# Altium PCB PCB1.PcbDoc
Units mil, origin at the board's own origin, x right, y up, seen from the top; angles counter-clockwise.
Board outline 3550 x 4871 mil, 2 copper layers (Top Layer, Bottom Layer); 4 components, 26 nets, 32 pads, 0 vias.
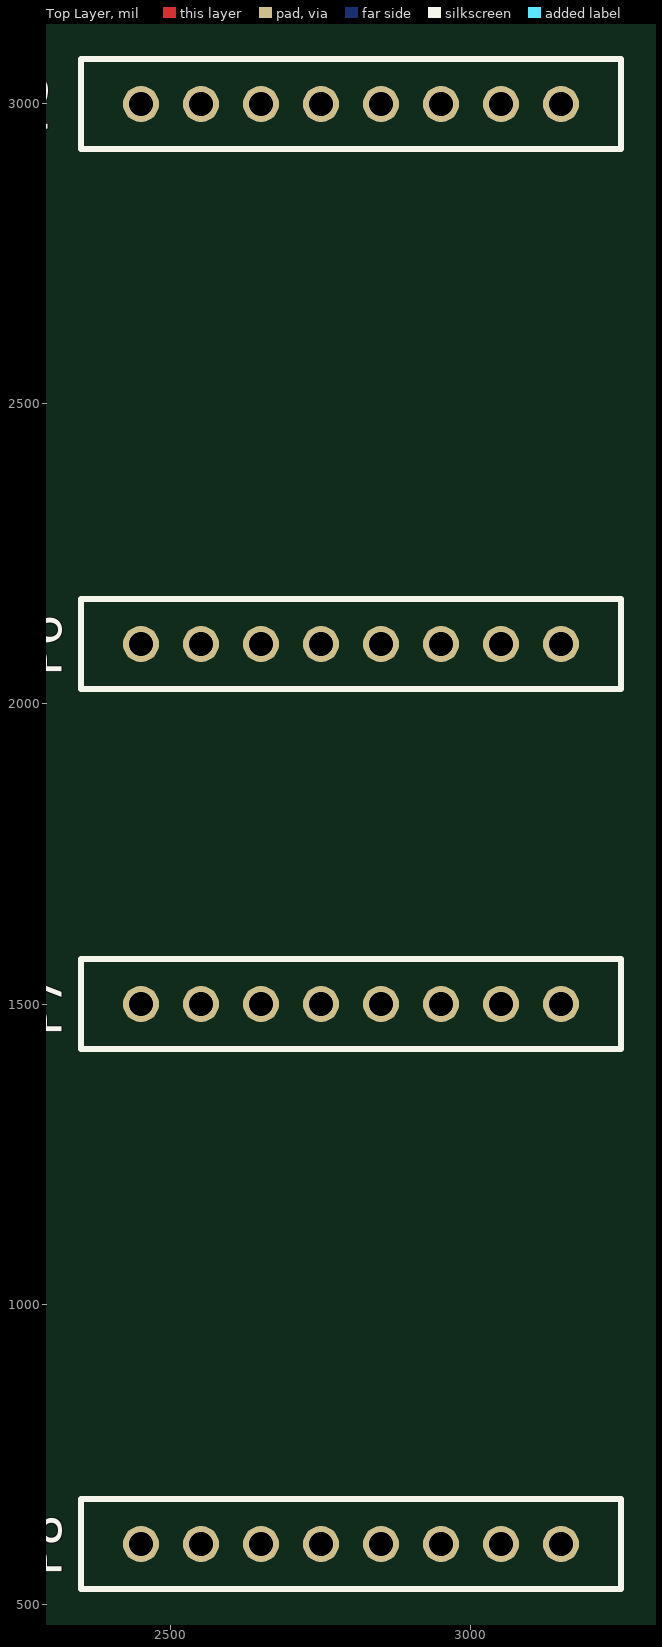
[diagram p0: Top Layer view]
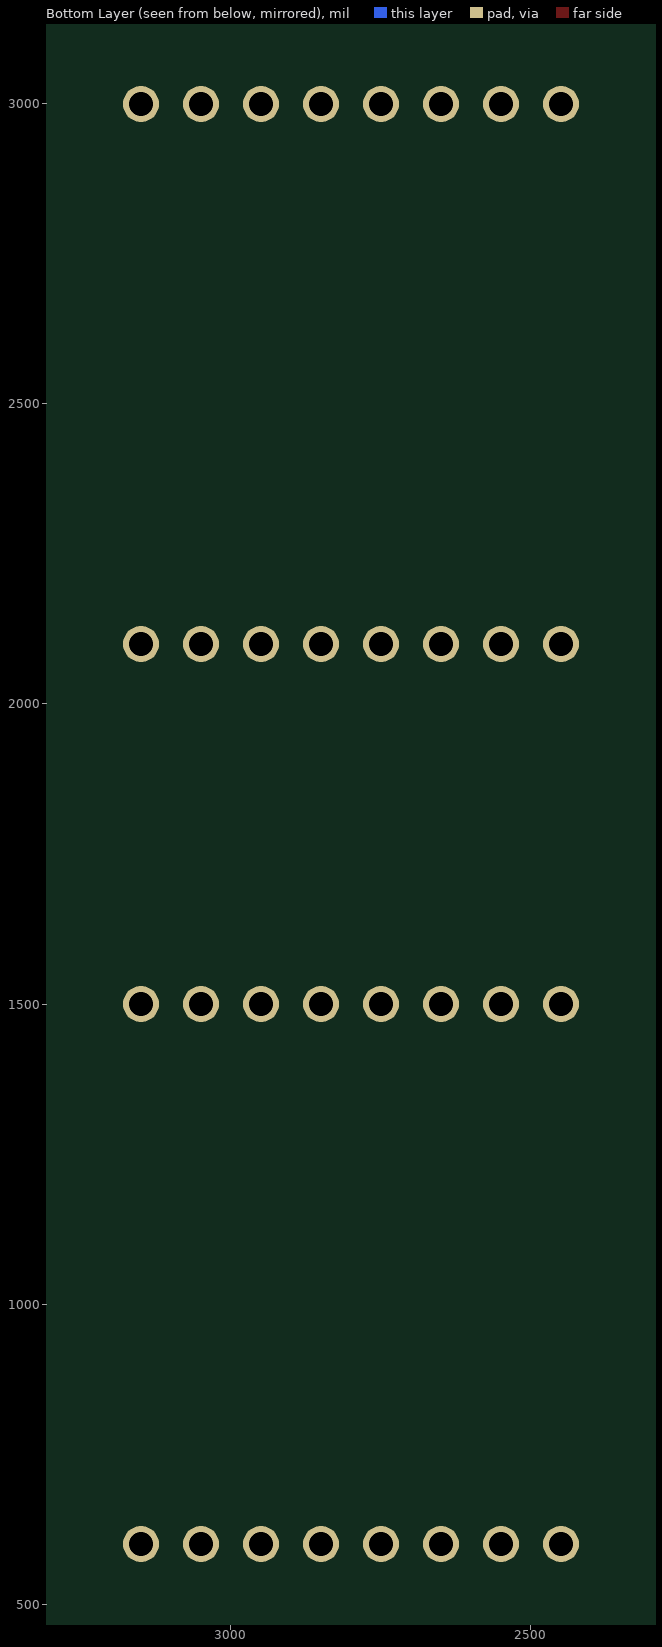
[diagram p1: Bottom Layer view, seen from below]

## Layer stack, top to bottom
Top Solder: solder mask 0.4, Solder Resist, Dk 3.5
Top Layer: signal copper 1.4
Dielectric 1: dielectric 12.6, FR-4, Dk 4.8
Bottom Layer: signal copper 1.4
Bottom Solder: solder mask 0.4, Solder Resist, Dk 3.5

## Board outline
0,0 3550,0 3550,4871 0,4871

## Design rules (kind name [scope] priority, off if disabled: settings)
Clearance [All] p1: gap=10 ignorepadtopadclearanceinfootprint=FALSE except(0: Arc-Hole Track-Hole SMDPad-Hole THPad-Hole Via-Hole Fill-Hole Poly-Hole Region-Hole Text-Hole)
PolygonConnect [All] p1: connectstyle=Relief reliefconductorwidth=10 reliefentries=4 polygonreliefangle="90 Angle" airgapwidth=10
RoutingVias [All] p1: holewidth=28 width=50 viastyle="Through Hole" minholewidth=28 minwidth=50 maxholewidth=28 maxwidth=50
SolderMaskExpansion [All] p1: expansion=4 istentingtop=FALSE
Width [All] p1: maxlimit=200 minlimit=10 preferedwidth=10 minimp=50.000000 maximp=50.000000 favimp=50.000000
30 further rules are at their usual default settings.

## Classes and differential pairs
component class Sheet1: P5 P6

## Components (designator, comment, footprint, x,y, rotation, side; value= is the part's Value field where it differs from the comment)
P5 "Header 8" HDR8 3250,3000 r180 top
P6 "Header 8" HDR8 2350,2100 r0 top
P7 "Header 8" HDR8 2350,1500 r0 top (schematic designator P6)
P8 "Header 8" HDR8 2350,600 r0 top (schematic designator P6)

## Footprints (in the part's own frame and the unit in brackets; to place one, negate y for a bottom-side part, rotate by r counter-clockwise, add the part's x,y. Pads: shape width x height; smd on the part's side, far side on the other; paste and mask are expansions set on the pad)
HDR8 [mil]
  round 60 hole 40: 1(100,0) 2(200,0) 3(300,0) 4(400,0) 5(500,0) 6(600,0) 7(700,0) 8(800,0)
  silkscreen extent 0,-75 900,75

## Part data
P5 P6 P7 P8: "Header, 8-Pin", LatestRevisionDate=17-Jul-2002, LatestRevisionNote="Re-released for DXP Platform.", Publisher="Altium Limited"

## Nets (pads, with @x,y where several pads share a name; then routed paths per layer and width w, separated by ;. In a path a pad name is that pad's centre, name@x,y a point inside that pad or via, vN(x,y) a via of type N, cw(c..) or ccw(c..) an arc to the next point about the centre after c; other vN are vias at no path point)
"Net5V BUS_1": 
Net5V_1: 
Net12CCONV_1: 
Net12CCONV_2: 
NetGND_1: 
NetLED2_1: 
NetLED3_1: 
NetLED_1: 
NetNANO_1: 
NetP5_1: P5.1
NetP5_2: P5.2
NetP5_3: P5.3
NetP5_4: P5.4
NetP5_5: P5.5
NetP5_6: P5.6
NetP5_7: P5.7
NetP5_8: P5.8
NetP6_1: P6.1
NetP6_2: P6.2
NetP6_3: P6.3
NetP6_4: P6.4
NetP6_5: P6.5
NetP6_6: P6.6
NetP6_7: P6.7
NetP6_8: P6.8
NetZ1_3: 
pads on no net: P7.1 P7.2 P7.3 P7.4 P7.5 P7.6 P7.7 P7.8 P8.1 P8.2 P8.3 P8.4 P8.5 P8.6 P8.7 P8.8